# Altium PCB Precharge_M2019_V1.1.PcbDoc
Units mil, origin at the board's own origin, x right, y up, seen from the top; angles counter-clockwise.
Board outline 2500 x 2000 mil, 2 copper layers (Top, Bottom); 24 components, 12 nets, 64 pads, 11 vias.
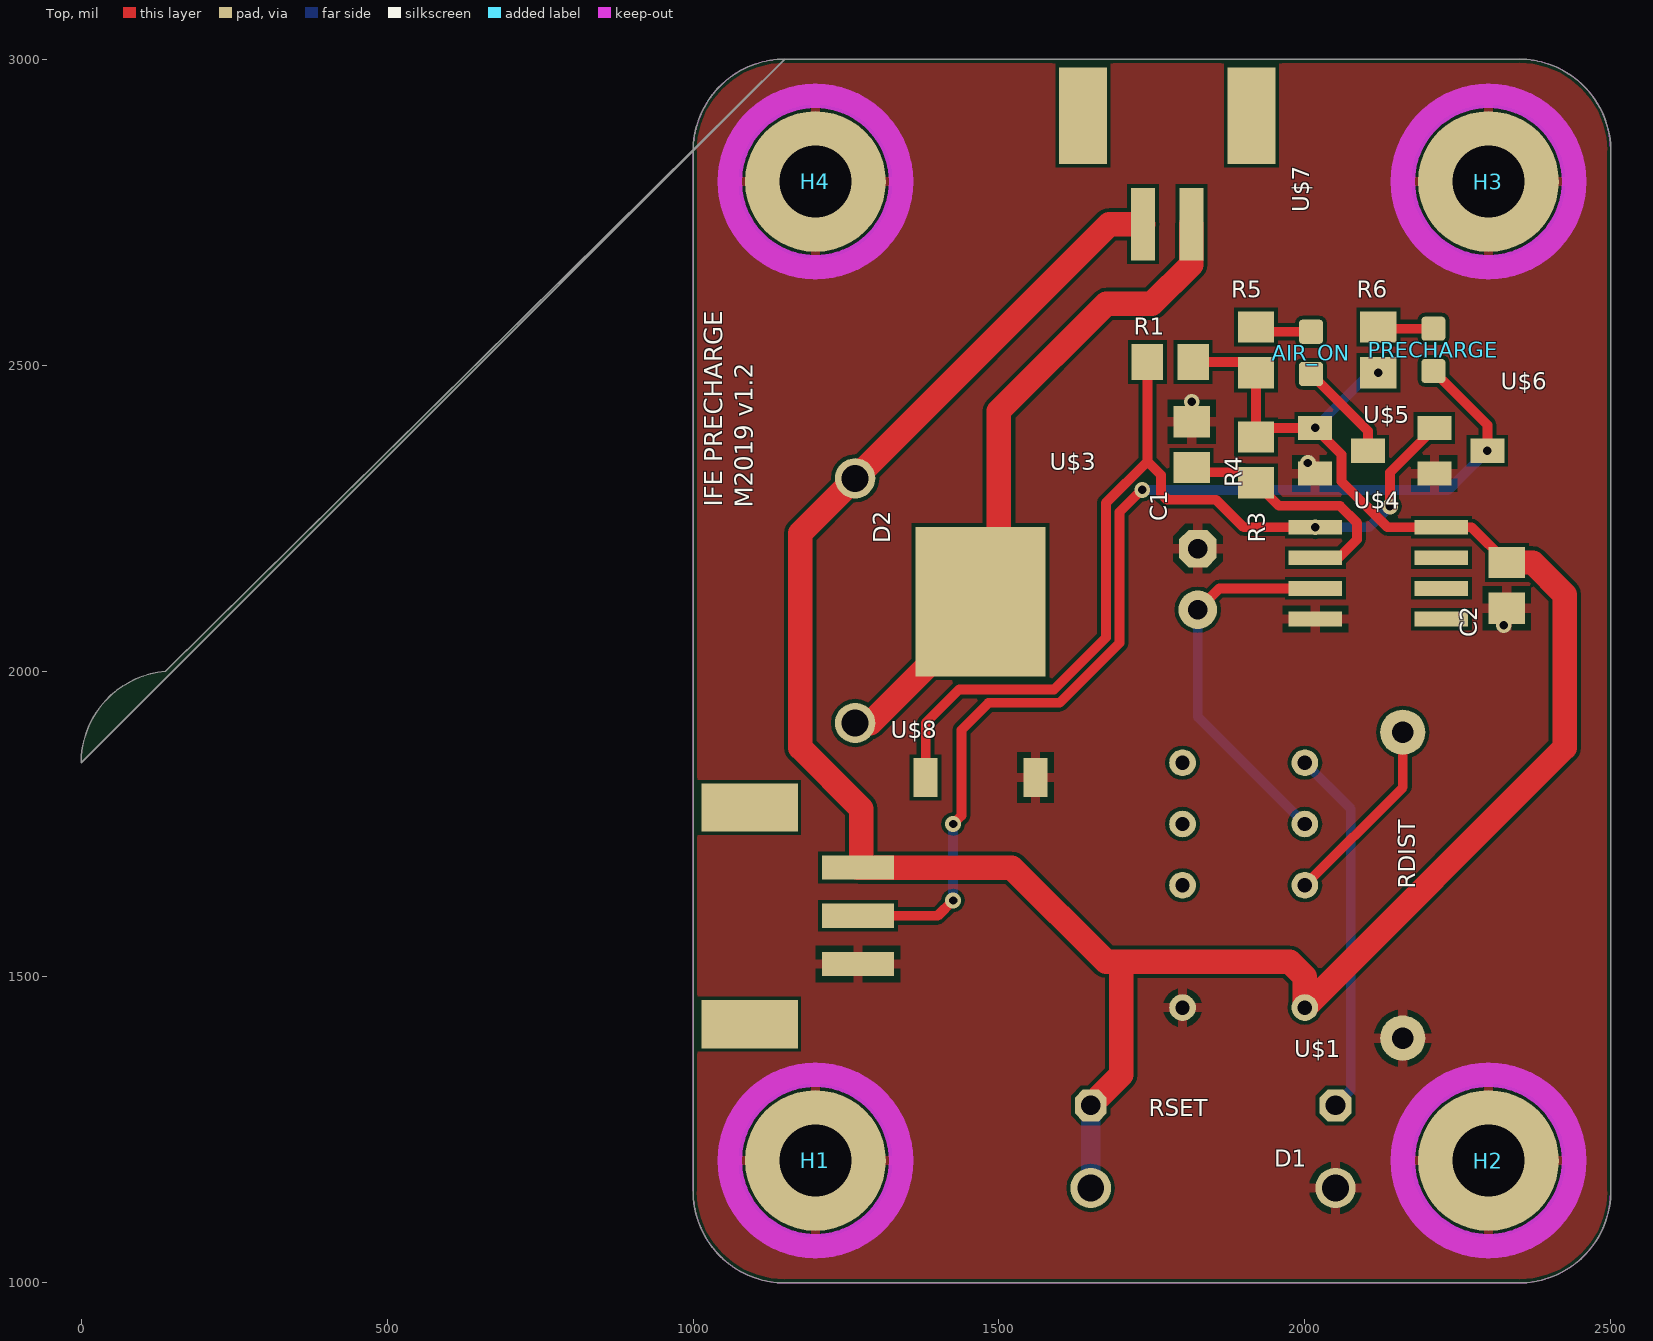
[diagram p0: Top view]
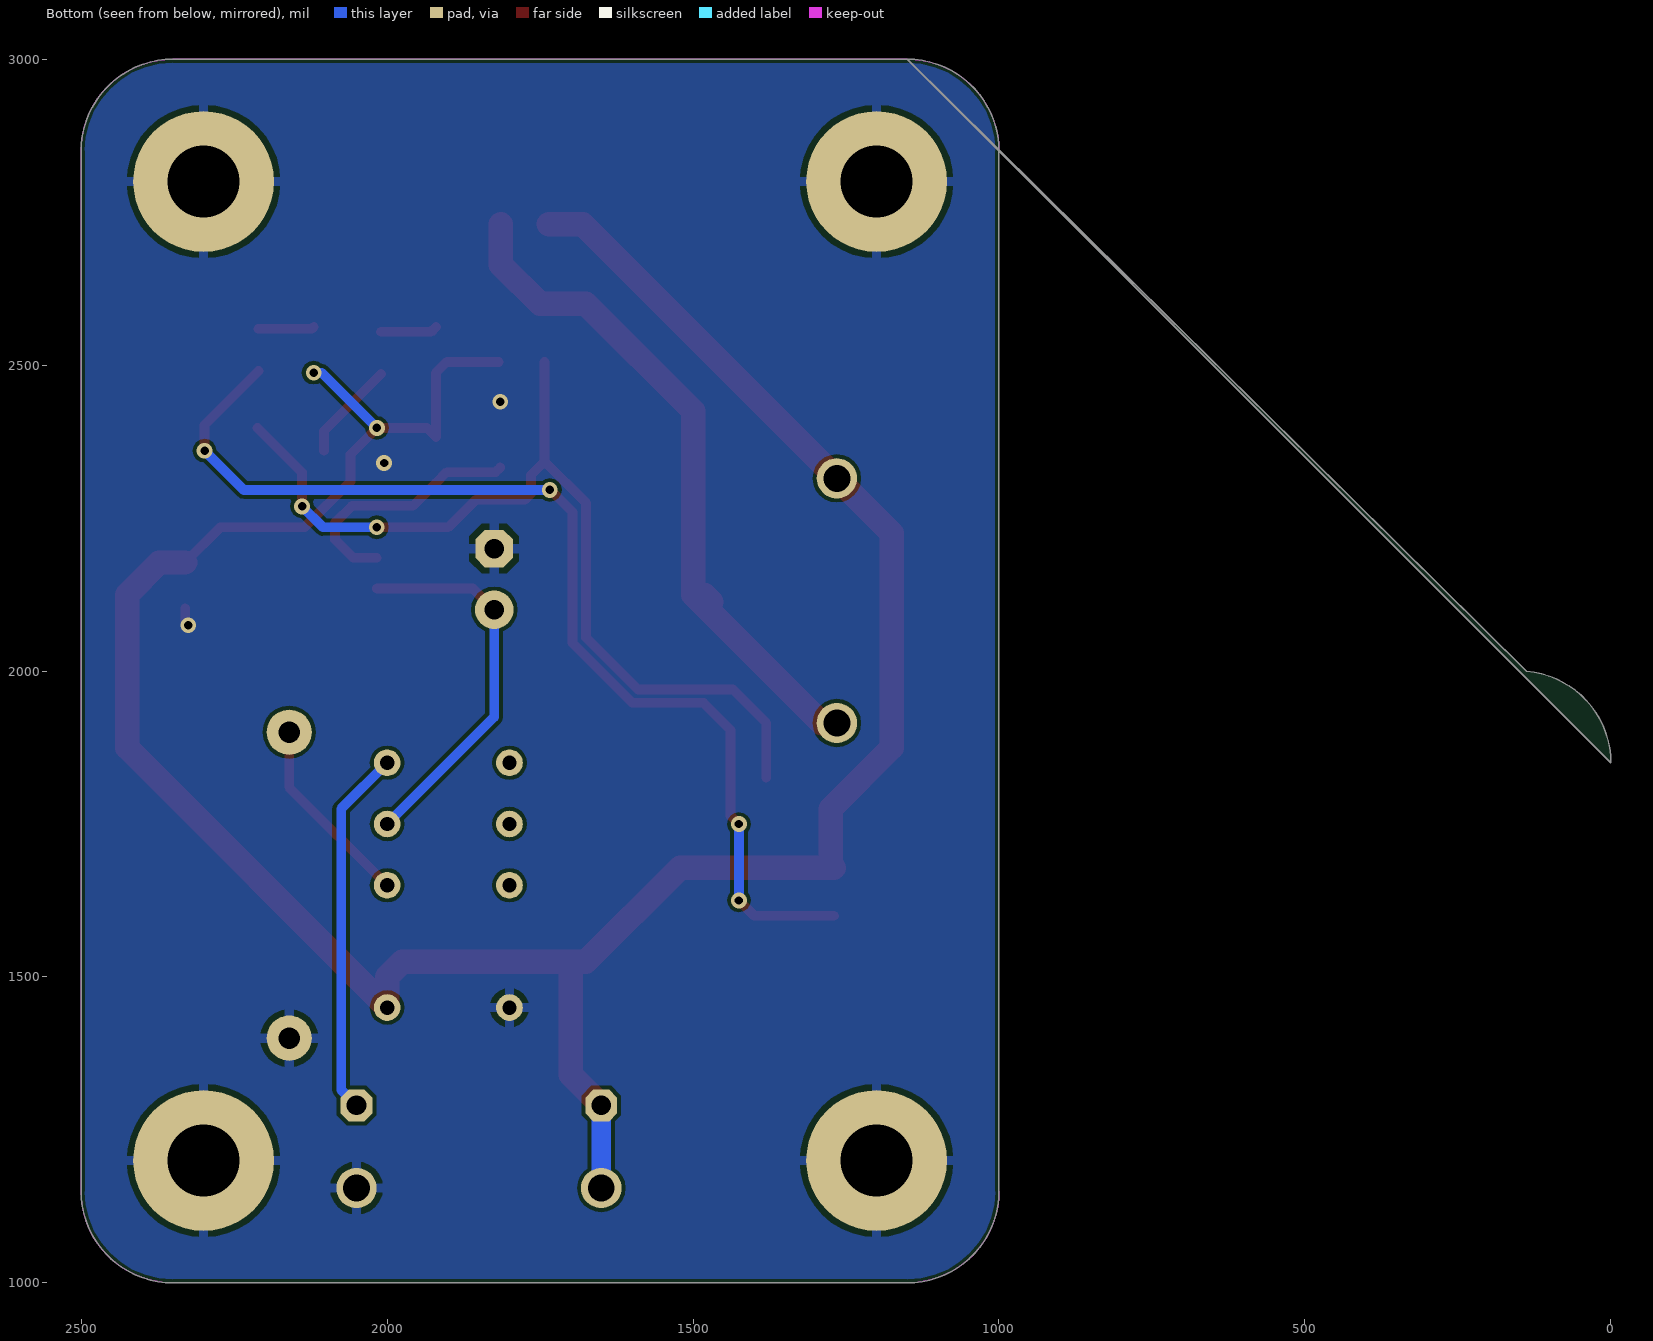
[diagram p1: Bottom view, seen from below]

## Layer stack, top to bottom
Top Solder: solder mask 0.4, Solder Resist, Dk 3.5
Top: signal copper 1.378
Dielectric 1: dielectric 12.6, FR-4, Dk 4.8
Bottom: signal copper 1.378
Bottom Solder: solder mask 0.4, Solder Resist, Dk 3.5

## Board outline
1150,3000 ccw(c1150,2850) 1000,2850 1000,1150 ccw(c1150,1150) 1150,1000 2350,1000 ccw(c2350,1150) 2500,1150 2500,2850 ccw(c2350,2850) 2350,3000 1150,3000 ccw(c150,1850)

## Design rules (kind name [scope] priority, off if disabled: settings)
Clearance "Clearance (Same Net)" [All] p1: gap=6 ignorepadtopadclearanceinfootprint=FALSE except(0: SMDPad-SMDPad SMDPad-THPad SMDPad-Via)
Clearance [All] p2: gap=6 ignorepadtopadclearanceinfootprint=FALSE except(16: Arc-Poly Track-Poly SMDPad-Poly THPad-Poly Via-Poly Fill-Poly Poly-Poly Poly-Region Poly-Text Poly-Hole)
HoleSize [All] p1: absolutevalues=TRUE maxlimit=100000 minlimit=12 maxpercent=80.000 minpercent=20.000
HoleToHoleClearance mdDrill [All] p1: gap=10 allowstackedmicrovias=TRUE
PasteMaskExpansion mlMinCreamFrame [All] p1: expansion=0
PolygonConnect ThermalVias [IsVia] p1: connectstyle=Direct reliefconductorwidth=10 reliefentries=4 polygonreliefangle="90 Angle" airgapwidth=10
PolygonConnect [All] p2: connectstyle=Relief reliefconductorwidth=16 reliefentries=4 polygonreliefangle="90 Angle" airgapwidth=10
RoutingVias [All] p1: holewidth=12 width=24 viastyle="Through Hole" minholewidth=12 minwidth=24 maxholewidth=100 maxwidth=100
SolderMaskExpansion mlMinStopFrame [All] p1: expansion=2
Width [All] p1: maxlimit=10000 minlimit=6 preferedwidth=6
27 further rules are at their usual default settings.

## Classes and differential pairs
polygon class Isolate_16: Polygon_1_Net_GND Polygon_2_Net_GND

## Components (designator, comment, footprint, x,y, rotation, side; value= is the part's Value field where it differs from the comment)
AIR_ON "" LED-0603 2010,2520 r180 top
C1 "" E2,5-5 1825,2150 r90 top
C2 "" C0805 2330,2140 r270 top
D1 "" DO41-10 1850,1155 r0 top
D2 "" DO41-10 1265,2115 r270 top
H1 "" 3,0-PAD 1200,1200 r0 top
H2 "" 3,0-PAD 2300,1200 r0 top
H3 "" 3,0-PAD 2300,2800 r0 top
H4 "" 3,0-PAD 1200,2800 r0 top
PRECHARGE "" LED-0603 2210,2525 r180 top
R1 "" R0805 1780,2505 r0 top
R3 "" R0805 1920,2345 r90 top
R4 "" R0805 1815,2370 r270 top
R5 "" R0805 1920,2525 r270 top
R6 "" R0805 2120,2525 r270 top
RDIST "" AXIAL-0.5 2160,1650 r270 top
RSET "" 0207/10 1850,1290 r180 top
U$1 "" DPDT_2.54 1900,1700 r90 top
U$3 "" DPACK 1470,2015 r0 top
U$4 "" SO08 2120,2160 r270 top
U$5 "" SOT23 2060,2360 r270 top
U$6 "" SOT23 2255,2360 r270 top
U$7 "" 505575-02 1775,2750 r0 top
U$8 "" 505575-03 1250,1600 r90 top

## Footprints (in the part's own frame and the unit in brackets; to place one, negate y for a bottom-side part, rotate by r counter-clockwise, add the part's x,y. Pads: shape width x height; smd on the part's side, far side on the other; paste and mask are expansions set on the pad)
3,0-PAD [mil] "3,0-PAD"
  round 230 / inner round 60 / far side round 230 hole 118.11: B3,0(0,0)
  Top keep-out circle w40: c0,0 r140
0207/10 [mil] "0207/10"
  oct 52x52 / inner oct 60x60 / far side oct 52x52 hole 32: 1(-200,0) 2(200,0)
505575-02 [mm] "505575-02"
  rect 1x3 smd: 1(-1,-0.5) 2(1,-0.5)
  rect 2x4 smd: P$3(-3.5,4) P$4(3.5,4)
505575-03 [mm] "505575-03"
  rect 1x3 smd: 1(-2,-0.5) 2(0,-0.5) 3(2,-0.5)
  rect 2x4 smd: P$3(-4.5,4) P$4(4.5,4)
AXIAL-0.5 [mil] "AXIAL-0.5"
  round 74 / inner round 60 / far side round 74 hole 35.43: P$1(-250,0) P$2(250,0)
C0805 [mil] "C0805"
  rect 51.18x59.06 smd: 1(-37.4,0) 2(37.4,0)
DO41-10 [mil] "DO41-10"
  round 66 / inner round 60 / far side round 66 hole 44: A(200,0) C(-200,0)
DPACK [mm] "DPACK"
  rect 1x1.6 smd: 1(-2.28,-4.8) 3(2.28,-4.8)
  rect 5.4x6.2 smd: 2(0,2.5)
DPDT_2.54 [mil] "DPDT_2.54"
  round 43.62 / inner round 60 / far side round 43.62 hole 23.62: $P1(-250,-100) $P3(-50,-100) $P4(50,-100) $P5(150,-100) $P8(150,100) $P9(50,100) $P10(-50,100) $P12(-250,100)
E2,5-5 [mil] "E2,5-5"
  round 63 / inner round 60 / far side round 63 hole 32: +(-50,0)
  oct 61x61 / inner oct 60x60 / far side oct 61x61 hole 32: -(50,0)
LED-0603 [mm] "LED-0603"
  rrect30% 1x1 smd: A(0,-0.877) C(0,0.877)
R0805 [mil] "R0805"
  rect 51.18x59.06 smd: 1(-37.4,0) 2(37.4,0)
SO08 [mil] "SO08"
  rect 24x87 smd: 1(-75,-103) 2(-25,-103) 3(25,-103) 4(75,-103) 5(75,103) 6(25,103) 7(-25,103) 8(-75,103)
SOT23 [mm] "SOT23"
  rect 1x1.4 smd: 1(-0.95,-1.1) 2(0.95,-1.1) 3(0,1.1)

## Part data
AIR_ON PRECHARGE: library part LED-0603, PackageName=LED-0603
C1: library part E2,5-5, PackageName=E2,5-5
C2: library part C0805, PackageName=C0805
D1 D2: library part DO41-10, PackageName=DO41-10
H1 H2 H3 H4: library part 3,0-PAD, PackageName=3,0-PAD
R1 R3 R4 R5 R6: library part R0805, PackageName=R0805
RDIST: library part AXIAL-0.5, PackageName=AXIAL-0.5
RSET: library part 0207/10, PackageName=0207/10
U$1: library part DPDT_2.54, PackageName=DPDT_2.54
U$3: library part DPACK, PackageName=DPACK
U$4: library part SO08, PackageName=SO08
U$5 U$6: library part SOT23, PackageName=SOT23
U$7: library part 505575-02, PackageName=505575-02
U$8: library part 505575-03, PackageName=505575-03

## Via types
v1: diameter 25.78/25.78 (per signal layer), hole 13.78, Top to Bottom, 11 vias

## Nets (pads, with @x,y where several pads share a name; then routed paths per layer and width w, separated by ;. In a path a pad name is that pad's centre, name@x,y a point inside that pad or via, vN(x,y) a via of type N, cw(c..) or ccw(c..) an arc to the next point about the centre after c; other vN are vias at no path point)
GND: C1.- C2.2 D1.A H1.B3,0 H2.B3,0 H3.B3,0 H4.B3,0 R4.1 RDIST.P$2 U$1.$P12 U$3.3 U$4.4 U$5.2 U$6.2 U$8.1 | length 29.7
  Top w16: v1(2325,2075) 2330,2080 C2.2
  other v1: 2005,2340 1815,2440
N$1: RSET.1 U$1.$P5 | length 601.4
  Bottom w16: U$1.$P5 2075,1775 2075,1315 RSET.1
N$3: RDIST.P$1 U$1.$P3 | length 316.3
  Top w16: U$1.$P3 2160,1810 RDIST.P$1
N$5: AIR_ON.A R5.1 | length 93.3
  Top w16: R5.1 1927.87,2554.53 AIR_ON.A
N$6: PRECHARGE.A R6.1 | length 91.2
  Top w16: R6.1 2122.87,2559.53 PRECHARGE.A
N$9: AIR_ON.C U$5.3 | length 164.1
  Top w16: AIR_ON.C 2103.31,2392.17 U$5.3
PRECHARGE: R1.1 U$3.1 U$4.1 U$6.1 | length 1551
  Top w16: U$3.1 1380.24,1915.24 1435,1970 1590,1970 1675,2055 1675,2275 1742.6,2342.6 ; R1.1 1742.6,2342.6 ; v1(2017,2235) 1900,2235 1855,2280 1775,2280 1765,2290 1765,2320.2 1742.6,2342.6 ; v1(2138.93,2269.1) 2138.93,2324.64 U$6.1
  Bottom w16: v1(2017,2235) 2104.84,2235 v1(2138.93,2269.1)
PRECHARGE_COMPLETE: PRECHARGE.C U$6.3 U$8.2 | length 1791.1
  Top w16: U$8.2 1400,1600 v1(1425,1625) ; v1(1425,1750) 1438.58,1763.58 1438.58,1903.58 1483,1948 1599.11,1948 1697,2045.89 1697,2260 1732.99,2295.99 v1(1734.01,2295.99) ; PRECHARGE.C 2298.31,2402.17 v1(2298.31,2360)
  Bottom w16: v1(1425,1625) v1(1425,1750) ; v1(1734.01,2295.99) 2234.29,2295.99 v1(2298.31,2360)
RELAY-: D2.A U$3.2 U$7.2 | length 1136.2
  Top w40: D2.A 1290,1915 U$3.2@1500,2125 ; U$3.2 1481.57,2125 U$3.2@1500,2125 ; U$7.2 1814.37,2664.37 1750,2600 1675,2600 1500,2425 U$3.2@1500,2125
TIMING: C1.+ U$1.$P4 U$4.3 | length 629
  Top w16: C1.+ 1860,2135 U$4.3
  Bottom w16: C1.+ 1825,1925 U$1.$P4
V+: C2.1 D1.C D2.C R1.2 R3.2 R5.2 R6.2 RSET.2 U$1.$P1 U$4.8 U$5.1 U$7.1 U$8.3 | length 4461.5
  Top w16: R1.2 1902.6,2505 R5.2 R3.2 1935,2397.4 v1(2016.69,2397.4) 2060,2354.09 2060,2310 2135,2235 U$4.8 2272.4,2235 C2.1
  Top w40: RSET.2 1700,1340 1700,1525 ; U$7.1 1680.32,2730.32 D2.C 1175,2225 1175,1875 1275,1775 1275,1684.06 U$8.3 1521.26,1678.74 1675,1525 1700,1525 ; C2.1 2372.6,2177.4 2425,2125 2425,1875 U$1.$P1 2000,1500 1975,1525 1700,1525
  Bottom w16: v1(2016.69,2397.4) 2106.89,2487.6 v1(2120,2487.6)
  Bottom w32: D1.C RSET.2
V_TRIG: R3.1 R4.2 U$4.2 | length 415.1
  Top w16: R4.2 1822.6,2325 1902.6,2325 R3.1 1957.6,2270 2057.3,2270 2085,2242.3 2085,2215 2055,2185 U$4.2
pads on no net: U$1.$P8 U$1.$P9 U$1.$P10 U$4.5 U$4.6 U$4.7 U$7.P$3 U$7.P$4 U$8.P$3 U$8.P$4

## Polygon pours and split planes (outlines as drawn)
GND on Top "Polygon_1_Net_GND" (solid, remove dead copper, pour order 1): 992,3008 992,992 2508,992 2508,3008
GND on Bottom "Polygon_2_Net_GND" (solid, remove dead copper, pour order 0): 992,3008 992,992 2508,992 2508,3008

## Keep-outs
Keep-Out Layer:
  the board outline again, w0

## Silkscreen, mask and mechanical layers (free items; w line width, h text height)
Top Overlay:
  text "IFE PRECHARGE" at 1057.48,2268.47 h49.6 r90
  text "M2019 v1.2" at 1107.48,2266.62 h49.6 r90
Dimension:
  the board outline again, w0

## Dimensions
1000,3000 to 1000,1000 on Courtyard Bottom
1000,3000 to 1000,1000 on Courtyard Bottom
1000,3000 to 2500,3000 on Courtyard Bottom
1000,3000 to 2500,3000 on Courtyard Bottom